# Altium PCB infantry chassis pcb.PcbDoc
Units mil, origin at the board's own origin, x right, y up, seen from the top; angles counter-clockwise.
Board outline 2933.72 x 1467.07 mil, 2 copper layers (Top Layer, Bottom Layer); 16 components, 22 nets, 73 pads, 8 vias.
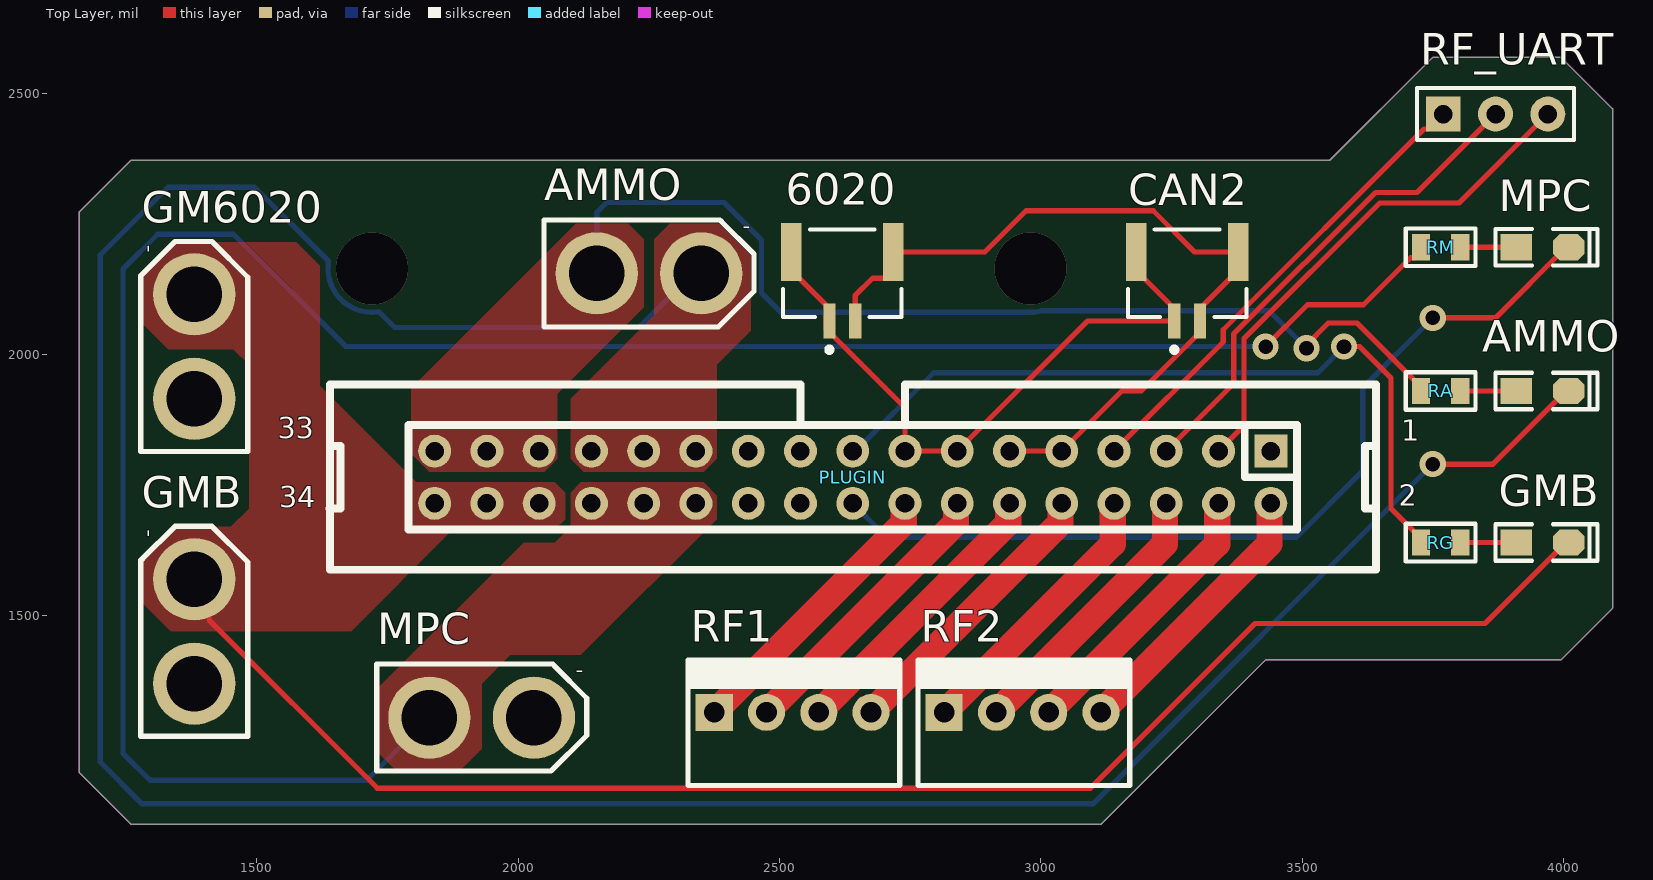
[diagram p0: Top Layer view]
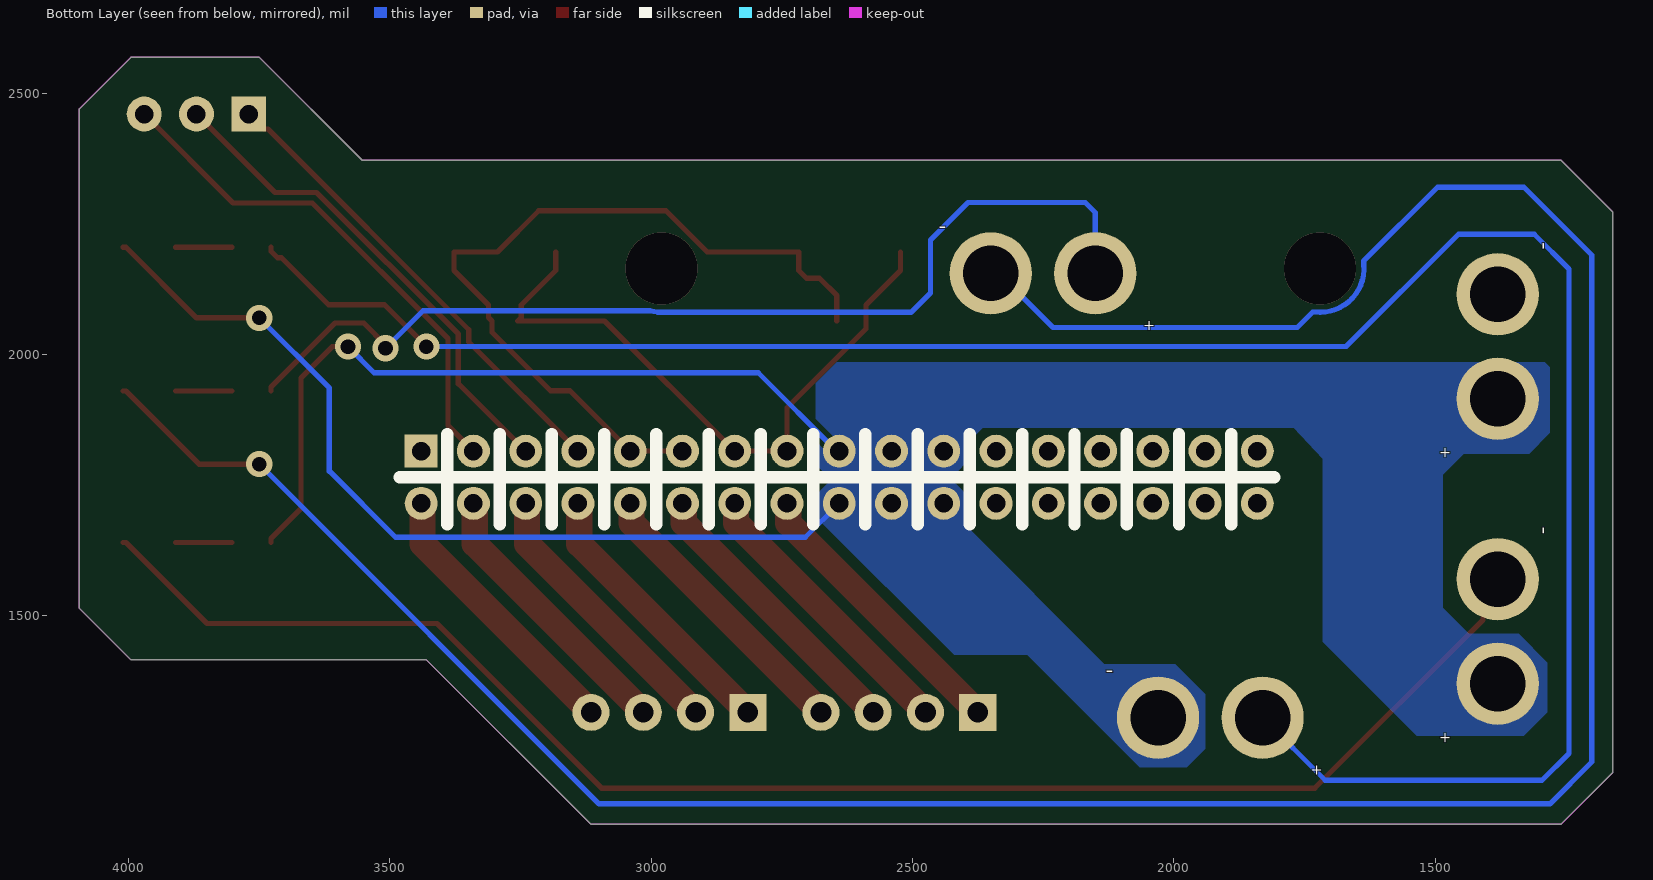
[diagram p1: Bottom Layer view, seen from below]

## Layer stack, top to bottom
Top Solder: solder mask 0.4, Solder Resist, Dk 3.5
Top Layer: signal copper 1.4
Dielectric 1: dielectric 12.6, FR-4, Dk 4.8
Bottom Layer: signal copper 1.4
Bottom Solder: solder mask 0.4, Solder Resist, Dk 3.5

## Board outline
1160.25,1199.63 1258.68,1101.2 3115.65,1101.2 3429.96,1415.51 3995.55,1415.51 4093.97,1513.94 4093.97,2469.84 3995.55,2568.27 3749.6,2568.27 3552.75,2371.42 1258.68,2371.42 1160.25,2272.99

## Design rules (kind name [scope] priority, off if disabled: settings)
Clearance [All] p1: gap=10 ignorepadtopadclearanceinfootprint=FALSE except(0: Arc-Hole Track-Hole SMDPad-Hole THPad-Hole Via-Hole Fill-Hole Poly-Hole Region-Hole Text-Hole)
PolygonConnect [All] p1: connectstyle=Direct reliefconductorwidth=10 reliefentries=4 polygonreliefangle="90 Angle" airgapwidth=10
RoutingVias [All] p1: holewidth=28 width=50 viastyle="Through Hole" minholewidth=28 minwidth=50 maxholewidth=28 maxwidth=50
SolderMaskExpansion [All] p1: expansion=4 istentingtop=FALSE
Width [All] p1: maxlimit=100 minlimit=10 preferedwidth=10
30 further rules are at their usual default settings.

## Classes and differential pairs
component class schematic: 6020 AMMO CAN2 GM6020 GMB MPC PLUGIN RA RF1 RF2 RF_UART RG RM

## Components (designator, comment, footprint, x,y, rotation, side; value= is the part's Value field where it differs from the comment)
6020 "CAN2" JST-BM02B-GHS-TBT_V 2620,2130 r0 top (schematic designator "CAN 6020")
AMMO "红色" "LED 0805G" 3960,1930 r0 top
AMMO "XT PLUGIN" XT30-M 2250,2155 r0 top
CAN2 "CAN2" JST-BM02B-GHS-TBT_V 3280,2130 r0 top
GM6020 "XT PLUGIN" XT30-M 1380,2015 r90 top
GMB "红色" "LED 0805G" 3960,1640 r0 top
GMB "XT PLUGIN" XT30-M 1380,1470 r90 top
MPC "红色" "LED 0805G" 3960,2205 r0 top
MPC "XT PLUGIN" XT30-M 1930,1305 r0 top
PLUGIN "Header 2X11" IDC2.54-LI-2x17P 3440,1815 r180 top
RA "10K" "R 0805_L" 3765,1930 r0 top
RF1 "HDR-1X4" KF2510-LI-4P 2525,1315 r0 top
RF2 "HDR-1X4" KF2510-LI-4P 2965,1315 r0 top
RF_UART "HDR-1X3" HDR2.54-LI-3P 3870,2460 r0 top
RG "10K" "R 0805_L" 3765,1640 r0 top
RM "10K" "R 0805_L" 3765,2205 r0 top

## Footprints (in the part's own frame and the unit in brackets; to place one, negate y for a bottom-side part, rotate by r counter-clockwise, add the part's x,y. Pads: shape width x height; smd on the part's side, far side on the other; paste and mask are expansions set on the pad)
HDR2.54-LI-3P [mm] "排针，3脚"
  rect 1.7x1.7 hole 0.9: 1(-2.54,0)
  round 1.7 hole 0.9: 2(0,0) 3(2.54,0)
  silkscreen extent -3.81,-1.27 3.81,1.27, body extent -3.81,-1.27 3.81,1.27, height 8.5
IDC2.54-LI-2x17P [mm] "34P简易牛角座"
  rect 1.6x1.6 hole 0.9: 1(0,0)
  round 1.6 hole 0.9: 2(0,2.54) 3(2.54,0) 4(2.54,2.54) 5(5.08,0) 6(5.08,2.54) 7(7.62,0) 8(7.62,2.54) 9(10.16,0) 10(10.16,2.54) 11(12.7,0) 12(12.7,2.54) 13(15.24,0) 14(15.24,2.54) 15(17.78,0) 16(17.78,2.54) 17(20.32,0) 18(20.32,2.54) 19(22.86,0) 20(22.86,2.54) 21(25.4,0) 22(25.4,2.54) 23(27.94,0) 24(27.94,2.54) 25(30.48,0) 26(30.48,2.54) 27(33.02,0) 28(33.02,2.54) 29(35.56,0) 30(35.56,2.54) 31(38.1,0) 32(38.1,2.54) 33(40.64,0) 34(40.64,2.54)
  silkscreen extent -5.11,-3.23 45.75,5.77, body extent -5.08,-3.08 45.72,5.77, height 9.17
JST-BM02B-GHS-TBT_V [mm] "Connector, 2-Leads, Body 5.75x4.25mm, Pitch 1.25mm"
  rect 0.6x1.7 smd: 1(-0.625,-1.675) 2(0.625,-1.675)
  rect 1x2.8 smd: MP1(-2.475,1.675) MP2(2.475,1.675)
  silkscreen extent -2.88,-3.2 2.88,2.78, body extent -2.88,-2.17 2.87,2.78, height 4.21
KF2510-LI-4P [mm] "接插件/2A"
  rect 1.8x1.8 hole 1: 1(-3.81,0)
  round 1.8 hole 1: 2(-1.27,0) 3(1.27,0) 4(3.81,0)
  silkscreen extent -5.08,-3.56 5.21,2.54, body extent -5.08,-3.5 5.08,2.4, height 11.05
"LED 0805G" [mil] "绿色0805LED                              淘宝ID:黄晶宝石"
  rect 60x50 smd: 1(-50,0)
  oct 60x50 smd: 2(50,0)
  silkscreen extent -90,-35 105,35, body extent -39,-25 39,25, height 32
"R 0805_L" [mil] "1/8W贴片电阻"
  rect 35x50 smd: 1(-37.4,0) 2(37.4,0)
  silkscreen extent -67,-36 67,36, body extent -39,-25 39,25, height 20
XT30-M [mm]
  round 4 hole 2.7: 1(-2.54,0) 2(2.54,0)
  silkscreen extent -5.1,-2.6 5.11,2.6, body extent -5.18,-2.8 5.02,2.8, height 10.66

## Part data
6020 CAN2: library part CMP-2000-05957-1, "Disconnectable Crimp Style Connector, Pitch 1.25 mm, 1 x 2 Position, Height 4.05 mm, -25 to 85 degC, RoHS, Tape and Reel", Color=Natural, Manufacturer=JST-Sales-America-Inc., Package Description="Disconnectable Crimp Style Connector, Pitch 1.25 mm, 1 x 2 Position, Height 4.05 mm", Package Reference=BM02B-GHS-TBT, Category=Connectors,Interconnects, Connector Type=Header,Shrouded, Contact Finish=Tin, Contact Finish Thickness=-, Contact Mating Length=-, Contact Type=OuterShroudContact, Datasheet URL=http://www.jst-mfg.com/product/pdf/eng/eGH.pdf, Datasheet Version=05/2016, Family=RectangularConnectors-Headers,MalePins, Fastening Type=LockingRamp, Features=SolderRetention, Manufacturer URL=http://www.jst.com/home2.html, Mounting Technology=SurfaceMount, Mounting Type=SurfaceMount, Number of Positions=2, Number of Positions Loaded=All, Number of Rows=1, Packaging=Digi-Reel®, Pitch="0.049\"(1.25mm)", Row Spacing=-, Series=GH, Termination=Solder
AMMO GMB MPC: library part LED-SMD, "贴片LED", BOM名称=贴片LED, 学习资源=https://shop463601444.taobao.com, 版权归属="封装库来自淘宝 ID：黄晶宝石"
PLUGIN: library part "Header 17X2", "17*2P接插件", BOM名称=17*2P接插件, 学习资源=https://shop463601444.taobao.com, 版权归属="封装库来自淘宝 ID：黄晶宝石"
RA RG RM: library part R, "贴片电阻", BOM名称=贴片电阻, 封装库来自淘宝卖家 ID：黄晶宝石=其他店铺购入均为盗版，不享受售后技术支持服务，请立即申请退款, 版权归属="来自淘宝 ID：黄晶宝石", 联系售后=https://shop463601444.taobao.com
RF1 RF2: library part "Header 4", "4P接插件", BOM名称=4P接插件, 学习资源=https://shop463601444.taobao.com, 版权归属="封装库来自淘宝 ID：黄晶宝石"
RF_UART: library part "Header 3", "3P接插件", BOM名称=3P接插件, 学习资源=https://shop463601444.taobao.com, 版权归属="封装库来自淘宝 ID：黄晶宝石"

## Via types
v1: diameter 50, hole 28, Top Layer to Bottom Layer, 6 vias
v2: diameter 137.8, hole 137.8, Top Layer to Bottom Layer, 1 vias
v3: diameter 137.79, hole 137.79, Top Layer to Bottom Layer, 1 vias

## Nets (pads, with @x,y where several pads share a name; then routed paths per layer and width w, separated by ;. In a path a pad name is that pad's centre, name@x,y a point inside that pad or via, vN(x,y) a via of type N, cw(c..) or ccw(c..) an arc to the next point about the centre after c; other vN are vias at no path point)
AMMO_DC: AMMO.1@2150,2155 PLUGIN.29 PLUGIN.31 PLUGIN.33 RA.1 | length 1960.2
  Top Layer w10: v1(3508.28,2011.72) 3508.28,2018.28 3550,2060 3605.1,2060 3727.6,1937.5 RA.1
  Bottom Layer w10: AMMO.1@2150,2155 2150,2271.35 2169.16,2290.51 2393.82,2290.51 2465.62,2218.71 2465.62,2117.62 2502.73,2080.52 2979.75,2080.52 ccw(c2979.75,2164.42) 3002.18,2083.57 3436.43,2083.57 3505,2015 v1(3508.28,2011.72)
AMMO_GND: AMMO.2 PLUGIN.23 PLUGIN.25 PLUGIN.27 | length 5526.9
  Top Layer w10: v1(3750,1790) 3865,1790 4005,1930 AMMO.2@4010,1930
  Bottom Layer w10: AMMO.2@2350,2170 2231.26,2051.26 1763.74,2051.26 1736.91,2078.09 ccw(c1729.81,2071.05) 1736.86,2078.14 1733.95,2081.05 1729.86,2081.05 ccw(c1729.81,2071.05) 1729.77,2081.05 1729.27,2081.05 cw(c1719.91,2164.42) 1636.29,2171.19 1636.54,2174.27 ccw(c1626.54,2174.32) 1636.54,2174.36 1636.54,2178.46 1495,2320 1330,2320 1200,2190 1200,1220 1280,1140 3100,1140 v1(3750,1790)
CAN2_H: 6020.2 6020.MP2 CAN2.2 CAN2.MP2 PLUGIN.9 PLUGIN.11 | length 1544.6
  Top Layer w10: 6020.2 2644.61,2112.52 2677.91,2145.83 2702.76,2145.83 2717.44,2160.51 6020.MP2 2892.63,2195.94 2971.69,2275 3215,2275 3294.06,2195.94 CAN2.MP2 3377.44,2160.51 3311.42,2094.49 3311.42,2070.87 CAN2.2 3304.61,2042.4 3192.57,1930.37 3155.36,1930.37 PLUGIN.9 PLUGIN.11
CAN2_L: 6020.1 6020.MP1 CAN2.1 CAN2.MP1 PLUGIN.13 PLUGIN.15 | length 1251.6
  Top Layer w10: 6020.MP1 2522.56,2160.51 2588.58,2094.49 2588.58,2049.21 2740,1897.8 PLUGIN.15 PLUGIN.13 3089.06,2064.06 CAN2.1 3248.58,2070.87 3248.58,2094.49 3182.56,2160.51 CAN2.MP1
GMB_DC: GM6020.1 GMB.1@1380,1370 PLUGIN.17 PLUGIN.19 PLUGIN.21 RG.1 | length 1476.6
  Top Layer w10: v1(3580,2015) 3610,2015 3670,1955 3670,1705.1 3727.6,1647.5 RG.1
  Bottom Layer w10: PLUGIN.17 2645,1815 2795,1965 3530,1965 v1(3580,2015)
GMB_GND: GM6020.2 GMB.2 PLUGIN.30 PLUGIN.32 PLUGIN.34 | length 3019.7
  Top Layer w10: GMB.2@1380,1570 1408.22,1541.78 1408.22,1491.78 1730,1170 3095,1170 3410,1485 3850,1485 4005,1640 GMB.2@4010,1640
MPC_DC: MPC.1@1830,1305 PLUGIN.24 PLUGIN.26 PLUGIN.28 RM.1 | length 4268.4
  Top Layer w10: v1(3430,2015) 3510,2095 3617.6,2095 3707.6,2185 3715.1,2185 3727.6,2197.5 RM.1
  Bottom Layer w10: MPC.1@1830,1305 1710,1185 1295,1185 1243.44,1236.56 1243.44,2163.44 1310,2230 1455,2230 1670,2015 v1(3430,2015)
MPC_GND: MPC.2 PLUGIN.18 PLUGIN.20 PLUGIN.22 | length 1720
  Top Layer w10: v1(3750,2070) 3870,2070 4005,2205 MPC.2@4010,2205
  Bottom Layer w10: PLUGIN.18 2705,1650 3489.14,1650 3615.74,1776.6 3615.74,1935.74 v1(3750,2070)
NetAMMO_1: AMMO.1@3910,1930 RA.2 | length 107.6
  Top Layer w10: RA.2 AMMO.1@3910,1930
NetGMB_1: GMB.1@3910,1640 RG.2 | length 107.6
  Top Layer w10: RG.2 GMB.1@3910,1640
NetMPC_1: MPC.1@3910,2205 RM.2 | length 107.6
  Top Layer w10: RM.2 MPC.1@3910,2205
Referee_1A: PLUGIN.10 RF1.4 | length 551.2
  Top Layer w50: RF1.4 3037.51,1677.51 3037.51,1712.51 PLUGIN.10
Referee_1B: PLUGIN.12 RF1.3 | length 551.2
  Top Layer w50: RF1.3 2937.51,1677.51 2937.51,1712.51 PLUGIN.12
Referee_1C: PLUGIN.14 RF1.2 | length 551.2
  Top Layer w50: RF1.2 2837.51,1677.51 2837.51,1712.51 PLUGIN.14
Referee_1D: PLUGIN.16 RF1.1 | length 551.2
  Top Layer w50: RF1.1 2737.51,1677.51 2737.51,1712.51 PLUGIN.16
Referee_2A: PLUGIN.2 RF2.4 | length 534.6
  Top Layer w50: RF2.4 3437.51,1637.51 3437.51,1712.51 PLUGIN.2
Referee_2B: PLUGIN.4 RF2.3 | length 534.6
  Top Layer w50: RF2.3 3337.51,1637.51 3337.51,1712.51 PLUGIN.4
Referee_2C: PLUGIN.6 RF2.2 | length 534.6
  Top Layer w50: RF2.2 3237.51,1637.51 3237.51,1712.51 PLUGIN.6
Referee_2D: PLUGIN.8 RF2.1 | length 534.6
  Top Layer w50: RF2.1 3137.51,1637.51 3137.51,1712.51 PLUGIN.8
UART_GND: PLUGIN.7 RF_UART.1 | length 910.7
  Top Layer w10: PLUGIN.7 3348.95,2023.95 3348.95,2047.08 3733.4,2431.54 3741.54,2431.54 RF_UART.1
UART_RX: PLUGIN.3 RF_UART.3 | length 994.7
  Top Layer w10: PLUGIN.3 3388.95,1863.95 3388.95,2030.51 3648.43,2290 3800,2290 RF_UART.3
UART_Tx: PLUGIN.5 RF_UART.2 | length 952.7
  Top Layer w10: PLUGIN.5 3368.95,1943.95 3368.95,2038.8 3640.15,2310 3720,2310 RF_UART.2
pads on no net: PLUGIN.1
copper on no net:
  other v1: 2979.75,2164.42
  other v2: 2979.75,2164.42
  other v3: 1719.91,2164.42

## Polygon pours and split planes (outlines as drawn)
MPC_GND on Bottom Layer "MPC_GND_L02_P008" (solid, pour order 8): 2420,1755 2660,1755 2680,1735 2680,1685 2420,1425 2280,1425 2065,1210 1975,1210 1940,1245 1940,1350 1997.5,1407.5 2132.5,1407.5 2400,1675 2400,1735
no net on Bottom Layer "NONET_L02_P002" (solid, pour order 2): 2205,1925
no net on Bottom Layer "NONET_L02_P001" (solid, pour order 1): 2205,1925
GMB_DC on Bottom Layer "GMB_DC_L02_P000" (solid, remove dead copper, pour order 0): 1285,1410 1340,1465 1435,1465 1485,1515 1485,1770 1445,1810 1320,1810 1280,1850 1280,1975 1290,1985 2645,1985 2685,1945 2685,1790 2665,1770 2420,1770 2390,1800 2390,1835 2365,1860 1770.09,1860 1715,1800 1715,1450 1535,1270 1330,1270 1285,1315
AMMO_DC on Top Layer "AMMO_DC_L01_P013" (solid, pour order 13): 2210,2250 2240,2220 2240,2090 2075,1925 2075,1800 2050,1775 1830,1775 1795,1810 1795,1935 2110,2250
AMMO_GND on Top Layer "AMMO_GND_L01_P012" (solid, pour order 12): 2385,2375
AMMO_GND on Top Layer "AMMO_GND_L01_P011" (solid, pour order 11): 2385,2250 2445,2190 2445,2045 2380,1980 2380,1800 2355,1775 2125,1775 2100,1800 2100,1915 2260,2075 2260,2220 2290,2250
AMMO_GND on Top Layer "AMMO_GND_L01_P010" (solid, pour order 10): 2270,2155
MPC_DC on Top Layer "MPC_DC_L01_P007" (solid, pour order 7): 2120,1755 2355,1755 2380,1730 2380,1685 2120,1425 1985,1425 1930,1370 1930,1245 1890,1205 1765,1205 1730,1240 1730,1360 2010,1640 2070,1640 2100,1670 2100,1735
GMB_GND on Top Layer "GMB_GND_L01_P004" (solid, pour order 4): 1340,2215 1275,2150 1275,2065 1330,2010 1455,2010 1485,1980 1485,1705 1450,1670 1345,1670 1280,1605 1280,1525 1335,1470 1680,1470 1875,1665 2070,1665 2090,1685 2090,1735 2070,1755 1805,1755 1620,1940 1620,2170 1575,2215
no net on Top Layer "NONET_L01_P003" (solid, pour order 3): 2420,2575

## Keep-outs
Keep-Out Layer:
  the board outline again, w0.5

## Silkscreen, mask and mechanical layers (free items; w line width, h text height)
Mechanical 1:
  the board outline again, w47.24

## Text inside footprints (layer, text, board x,y; h text height)
AMMO: Bottom Overlay "+" at 2057.89,2045.76 h20; Bottom Overlay "-" at 2450,2232 h30; Top Overlay "-" at 2430,2232 h30
GM6020: Bottom Overlay "-" at 1303,2215 h30 r90; Bottom Overlay "+" at 1489.24,1822.89 h20 r90; Top Overlay "-" at 1303,2195 h30 r90
GMB: Bottom Overlay "-" at 1303,1670 h30 r90; Bottom Overlay "+" at 1489.24,1277.89 h20 r90; Top Overlay "-" at 1303,1650 h30 r90
MPC: Bottom Overlay "+" at 1737.89,1195.76 h20; Bottom Overlay "-" at 2130,1382 h30; Top Overlay "-" at 2110,1382 h30
PLUGIN: Top Overlay "2" at 3685,1710 h40; Top Overlay "1" at 3690,1835 h40; Top Overlay "34" at 1543,1708 h40; Top Overlay "33" at 1540,1840 h40